# Altium PCB bh_netlan_0_alph.PcbDoc (part 2 of 2)
Units mm, origin at the board's own origin, x right, y up, seen from the top; angles counter-clockwise.
Board outline 39.5 x 59.44 mm, 2 copper layers (Top Layer, Bottom Layer); 62 components, 42 nets, 232 pads, 67 vias.
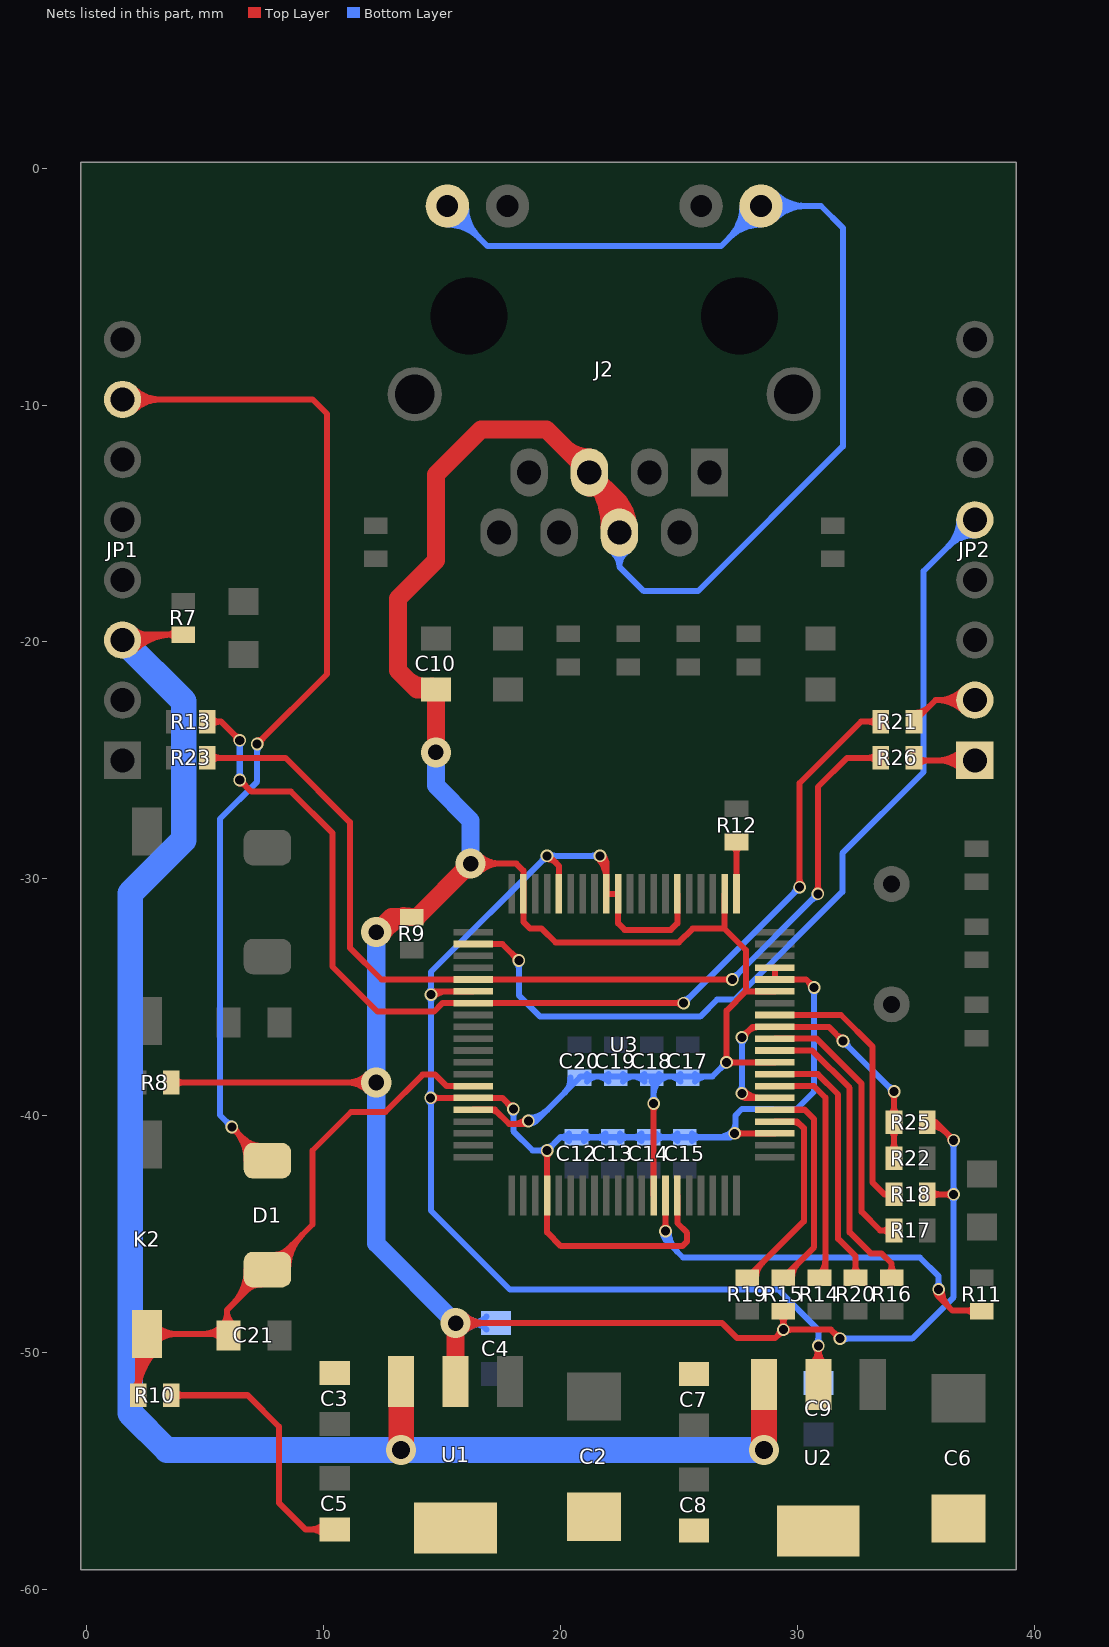
[diagram p2: the nets of this part, all layers, seen from the top]

## Via types
v1: diameter 0.533, hole 0.381, Top Layer to Bottom Layer, tented both sides, 53 vias
v2: diameter 1.27, hole 0.66, Top Layer to Bottom Layer, tented both sides, 8 vias
v3: diameter 0.533, hole 0.381, Top Layer to Bottom Layer, 4 vias
v4: diameter 1.27, hole 0.762, Top Layer to Bottom Layer, tented both sides, 2 vias

## Nets (pads, with @x,y where several pads share a name; then routed paths per layer and width w, separated by ;. In a path a pad name is that pad's centre, name@x,y a point inside that pad or via, vN(x,y) a via of type N, cw(c..) or ccw(c..) an arc to the next point about the centre after c; other vN are vias at no path point) (continued)
NetR11_1: R11.1 U3.14 | length 23.3
  Top Layer w0.254: v1@24.333,-44.783 ccw(c24.095,-44.545) 24.432,-44.545 ccw(c24.769,-44.545) v1@24.531,-44.783 ; v1(24.432,-44.882) U3.14@24.432,-43.378 ; v1@35.852,-47.343 ccw(c36.291,-47.354) 35.98,-47.664 ; v1(35.966,-47.346) 35.966,-47.65 ; v1@36.106,-47.349 ccw(c37.104,-47.376) 36.398,-48.082 ; 37.042,-48.235 cw(c37.042,-48.86) R11.1@37.484,-48.418 ; 37.165,-48.235 ccw(c37.165,-47.783) R11.1@37.484,-48.102 ; R11.1@37.592,-48.235 36.551,-48.235 35.966,-47.65 ; 35.966,-47.65 ccw(c35.704,-47.65) 35.875,-47.451 cw(c35.704,-47.65) 35.966,-47.65 ; 35.966,-47.65 cw(c36.229,-47.65) 36.058,-47.451 ccw(c36.229,-47.65) 35.966,-47.65
  Bottom Layer w0.254: v1@24.318,-44.882 ccw(c24.955,-44.882) 24.505,-45.333 ; v1(24.432,-44.882) 24.432,-45.26 25.171,-45.999 35.179,-45.999 35.966,-46.787 v1(35.966,-47.346) ; v1@24.572,-44.882 ccw(c25.823,-44.882) 24.938,-45.766 ; v1@35.868,-47.247 ccw(c35.629,-47.008) 35.966,-47.008 ccw(c36.304,-47.008) v1@36.065,-47.247 ; 24.432,-45.219 ccw(c24.095,-45.219) 24.333,-44.981 cw(c24.095,-45.219) 24.432,-45.219 ; 24.432,-45.219 cw(c24.769,-45.219) 24.531,-44.981 ccw(c24.769,-45.219) 24.432,-45.219
NetR12_1: R12.1 U3.41 | length 3
  Top Layer w0.254: R12.1@27.274,-28.606 cw(c26.894,-28.986) 27.432,-28.986 cw(c27.97,-28.986) R12.1@27.59,-28.606 ; U3.41@27.432,-30.638 R12.1@27.432,-28.448
NetR14_2: R14.2 U3.27 | length 10.8
  Top Layer w0.254: U3.27@29.052,-38.758 30.706,-38.758 31.191,-39.243 31.191,-46.606 R14.2@30.937,-46.86 ; R14.2@30.93,-46.702 ccw(c30.298,-46.071) 31.191,-46.071
NetR15_2: R15.2 U3.25 | length 9.8
  Top Layer w0.254: U3.25@29.052,-39.758 30.309,-39.758 30.709,-40.157 30.709,-45.565 R15.2@29.413,-46.86 ; R15.2@29.786,-46.86 cw(c30.687,-46.86) 30.05,-46.223
NetR16_2: R16.2 U3.30 | length 13.7
  Top Layer w0.254: U3.30@29.052,-37.258 30.628,-37.258 32.207,-38.837 32.207,-44.933 33.096,-45.822 33.553,-45.822 33.985,-46.253 R16.2@33.985,-46.86 ; R16.2@33.828,-46.702 ccw(c33.447,-46.322) 33.985,-46.322 ccw(c34.524,-46.322) R16.2@34.143,-46.702
NetR17_2: R17.2 U3.31 | length 12.4
  Top Layer w0.254: U3.31@29.052,-36.758 30.814,-36.758 32.715,-38.659 32.715,-44.069 33.503,-44.856 R17.2@34.084,-44.856 ; R17.2@33.926,-45.014 ccw(c33.545,-45.395) 33.545,-44.856 ccw(c33.545,-44.318) R17.2@33.926,-44.699
NetR18_2: R18.2 U3.33 | length 12
  Top Layer w0.254: U3.33@29.052,-35.758 31.846,-35.758 33.172,-37.084 33.172,-42.824 33.68,-43.332 ; R18.2@33.895,-43.451 ccw(c33.68,-43.586) 33.68,-43.332 ; R18.2@33.895,-43.214 cw(c33.68,-43.079) 33.68,-43.332 ; R18.2@34.084,-43.332 33.68,-43.332
NetR19_2: R19.2 U3.24 | length 10.2
  Top Layer w0.254: R19.2@27.889,-46.86 30.277,-44.472 30.277,-40.538 29.996,-40.258 U3.24@29.052,-40.258 ; R19.2@28.262,-46.86 cw(c29.163,-46.86) 28.526,-46.223 ; U3.24@29.751,-40.271 cw(c29.751,-40.894) 30.191,-40.453 ; U3.24@29.753,-40.27 cw(c29.833,-40.666) 30.119,-40.381
NetR20_2: R20.2 U3.28 | length 11.9
  Top Layer w0.254: U3.28@29.052,-38.258 30.866,-38.258 31.725,-39.116 31.725,-45.212 32.461,-45.949 R20.2@32.461,-46.86 ; R20.2@32.304,-46.702 ccw(c31.923,-46.322) 32.461,-46.322 ccw(c33,-46.322) R20.2@32.619,-46.702
NetR22_1: R22.1 R25.2 U3.26 U3.32 | length 22.6
  Top Layer w0.254: v1@27.58,-39.146 ccw(c27.85,-38.876) 27.85,-39.258 ; v1(27.661,-39.065) 27.853,-39.258 U3.26@29.052,-39.258 ; v1(27.661,-36.703) 28.106,-36.258 U3.32@29.052,-36.258 31.33,-36.258 v1(31.928,-36.855) ; v1@27.661,-36.563 ccw(c27.661,-36.226) 27.899,-36.465 ccw(c28.138,-36.703) v1@27.8,-36.703 ; v1@27.759,-38.966 ccw(c28.463,-38.263) U3.26@28.463,-39.258 ; 27.909,-36.455 cw(c28.354,-36.9) U3.32@28.354,-36.27 ; 27.982,-36.382 cw(c28.27,-36.67) U3.32@28.351,-36.27 ; v1@31.788,-36.855 ccw(c31.451,-36.855) 31.689,-36.617 ccw(c31.928,-36.378) v1@31.928,-36.716 ; R22.1@33.926,-41.501 ccw(c33.545,-41.12) 34.084,-41.12 ccw(c34.622,-41.12) R22.1@34.241,-41.501 ; R25.2@33.926,-40.592 cw(c33.545,-40.973) 34.084,-40.973 cw(c34.622,-40.973) R25.2@34.241,-40.592 ; R25.2@33.926,-39.977 ccw(c33.545,-39.596) 34.084,-39.596 ccw(c34.622,-39.596) R25.2@34.241,-39.977 ; v1@33.988,-39.088 cw(c33.757,-39.319) 34.084,-39.319 ; R22.1@34.084,-41.808 R25.2@34.084,-40.284 v1@34.084,-38.992 ; 34.084,-39.334 cw(c34.431,-39.334) v1@34.186,-39.088
  Bottom Layer w0.254: v1@27.562,-38.966 ccw(c27.323,-38.728) 27.661,-38.728 ccw(c27.998,-38.728) v1@27.759,-38.966 ; v1@27.562,-36.802 cw(c27.323,-37.04) 27.661,-37.04 cw(c27.998,-37.04) v1@27.759,-36.802 ; v1(27.661,-39.065) v1(27.661,-36.703) ; v1@31.928,-36.995 cw(c31.928,-37.332) 32.166,-37.094 cw(c32.405,-36.855) v1@32.067,-36.855 ; v1(31.928,-36.855) v1@34.087,-39.014 ; 33.805,-38.733 ccw(c34.087,-38.451) v1@34.087,-38.849 ; 33.866,-38.794 cw(c33.671,-38.989) v1@33.947,-38.989
  other v1: 34.087,-38.989
NNRST: D1.2 JP1.7 | length 52.7
  Top Layer w0.254: JP1.7@1.5,-9.76 9.531,-9.76 10.135,-10.363 10.135,-21.361 v1(7.188,-24.308) ; JP1.7@1.787,-10.047 cw(c2.481,-10.741) 2.481,-9.76 cw(c2.481,-8.779) JP1.7@1.787,-9.473 ; JP1.7@1.967,-10.227 cw(c3.094,-11.354) 3.094,-9.76 cw(c3.094,-8.166) JP1.7@1.967,-9.293 ; v1@6.121,-40.627 cw(c6.121,-40.965) 6.36,-40.726 cw(c6.598,-40.488) v1@6.261,-40.488 ; v1(6.121,-40.488) D1.2@7.544,-41.91 ; v1@6.183,-40.55 cw(c4.823,-41.91) D1.2@6.747,-41.91 ; 6.603,-40.97 ccw(c7.37,-40.203) D1.2@7.37,-41.287 ; 6.617,-40.983 cw(c5.69,-41.91) D1.2@7.001,-41.91 ; v1@7.188,-24.168 ccw(c7.188,-23.831) 7.427,-24.069 ccw(c7.665,-24.308) v1@7.328,-24.308
  Bottom Layer w0.254: v1@5.982,-40.488 ccw(c5.644,-40.488) 5.883,-40.249 ccw(c6.121,-40.011) v1@6.121,-40.348 ; v1(6.121,-40.488) 5.613,-39.98 5.613,-27.478 7.188,-25.903 v1(7.188,-24.308) ; v1@7.089,-24.407 cw(c6.851,-24.645) 7.188,-24.645 cw(c7.525,-24.645) v1@7.287,-24.407
NRST: C21.2 D1.1 K2.2 R10.2 U3.74 | length 40.8
  Top Layer w0.254: R10.2@1.998,-51.508 ccw(c1.618,-51.128) 2.156,-51.128 ccw(c2.694,-51.128) R10.2@2.314,-51.508 ; R10.2@2.156,-51.816 2.156,-49.61 K2.2@2.54,-49.226 5.905,-49.226 5.905,-48.225 ; R10.2@2.156,-51.761 cw(c4.693,-51.761) K2.2@2.899,-49.966 ; 2.156,-51.147 cw(c4.08,-51.147) K2.2@2.72,-49.787 ; 2.156,-50.534 cw(c3.467,-50.534) K2.2@2.54,-49.607 ; K2.2@2.899,-49.585 cw(c3.766,-50.453) 3.766,-49.226 cw(c3.766,-48) K2.2@2.899,-48.867 ; 4.897,-49.226 ccw(c4.897,-48.091) 5.7,-48.894 ccw(c5.204,-48.398) 5.905,-48.398 ; 5.201,-49.226 cw(c5.201,-49.931) C21.2@5.7,-49.433 ; 6.13,-48 ccw(c4.639,-46.51) D1.1@6.747,-46.51 ; C21.2@6.21,-48.868 cw(c6.735,-48.225) 5.905,-48.225 ; 6.563,-47.567 ccw(c5.507,-46.51) D1.1@7.001,-46.51 ; 6.733,-47.397 cw(c7.37,-48.034) D1.1@7.37,-47.133 ; D1.1@7.87,-45.887 ccw(c7.87,-44.987) 8.507,-45.623 ; D1.1@8.239,-46.51 cw(c9.733,-46.51) 8.677,-45.453 ; D1.1@8.493,-46.51 cw(c10.601,-46.51) 9.11,-45.02 ; U3.74@16.312,-38.758 15.187,-38.758 14.707,-38.278 14.173,-38.278 12.598,-39.853 11.151,-39.853 9.525,-41.478 9.525,-44.605 D1.1@7.62,-46.51 5.905,-48.225
RTS: JP2.5 U3.62 | length 43
  Top Layer w0.254: U3.62@16.312,-32.758 17.543,-32.758 v1(18.237,-33.452) ; v1@18.098,-33.452 ccw(c17.76,-33.452) 17.999,-33.213 ccw(c18.237,-32.975) v1@18.237,-33.312
  Bottom Layer w0.254: v1@18.138,-33.551 cw(c17.9,-33.789) 18.237,-33.789 cw(c18.574,-33.789) v1@18.336,-33.551 ; v1(18.237,-33.452) 18.237,-34.925 19.139,-35.827 25.895,-35.827 26.619,-35.103 27.356,-35.103 31.902,-30.556 31.902,-28.931 35.331,-25.502 35.331,-17.009 JP2.5@37.5,-14.84 ; JP2.5@36.84,-14.84 cw(c35.245,-14.84) 36.373,-15.967 cw(c37.5,-17.095) JP2.5@37.5,-15.5 ; JP2.5@37.094,-14.84 cw(c36.112,-14.84) 36.806,-15.534 cw(c37.5,-16.228) JP2.5@37.5,-15.246
RXD00: JP2.2 R21.2 | length 7.7
  Top Layer w0.254: R21.2@34.928,-23.368 35.836,-22.46 JP2.2@37.5,-22.46 ; R21.2@34.928,-22.995 ccw(c34.928,-22.095) 35.565,-22.731 ; JP2.2@37.033,-22.927 ccw(c35.906,-24.054) 35.906,-22.46 ccw(c35.906,-20.866) JP2.2@37.033,-21.993 ; JP2.2@37.213,-22.747 ccw(c36.519,-23.441) 36.519,-22.46 ccw(c36.519,-21.479) JP2.2@37.213,-22.173
RXD0: R23.1 R26.1 U3.65 | length 45.8
  Top Layer w0.254: R23.1@5.08,-24.892 8.382,-24.892 11.1,-27.61 11.1,-32.918 12.439,-34.258 U3.65@16.312,-34.258 v1(27.254,-34.258) ; R23.1@5.238,-25.05 cw(c5.618,-25.43) 5.618,-24.892 cw(c5.618,-24.354) R23.1@5.238,-24.734 ; v1@27.155,-34.357 ccw(c26.917,-34.595) 26.917,-34.258 ccw(c26.917,-33.921) v1@27.155,-34.159 ; v1@30.772,-30.543 ccw(c30.533,-30.304) 30.87,-30.304 ccw(c31.208,-30.304) v1@30.969,-30.543 ; v1(30.87,-30.642) 30.87,-26.127 32.106,-24.892 R26.1@33.528,-24.892 ; R26.1@33.37,-25.05 ccw(c32.99,-25.43) 32.99,-24.892 ccw(c32.99,-24.354) R26.1@33.37,-24.734
  Bottom Layer w0.254: v1(27.254,-34.258) v1(30.87,-30.642) ; v1@27.254,-34.118 ccw(c27.254,-33.781) 27.493,-34.019 ccw(c27.731,-34.258) v1@27.394,-34.258 ; v1@30.731,-30.642 cw(c30.393,-30.642) 30.632,-30.88 cw(c30.87,-31.119) v1@30.87,-30.781
TXD00: JP2.1 R26.2 | length 7.5
  Top Layer w0.254: R26.2@34.928,-24.892 35.036,-25 JP2.1@37.5,-25 ; R26.2@35.086,-25.2 cw(c35.568,-25.682) 35.568,-25 ; R26.2@35.086,-24.884 ccw(c35.365,-24.605) 35.365,-25 ; JP2.1@37.033,-25.467 ccw(c35.906,-26.594) 35.906,-25 ccw(c35.906,-23.406) JP2.1@37.033,-24.533 ; JP2.1@37.213,-25.287 ccw(c36.519,-25.981) 36.519,-25 ccw(c36.519,-24.019) JP2.1@37.213,-24.713
TXD0: R13.1 R21.1 U3.67 | length 51.4
  Top Layer w0.254: R13.1@5.08,-23.368 5.664,-23.368 v1(6.452,-24.155) ; R13.1@5.238,-23.526 cw(c5.618,-23.906) 5.618,-23.368 cw(c5.618,-22.83) R13.1@5.238,-23.21 ; v1@6.312,-24.155 ccw(c5.975,-24.155) 6.213,-23.917 ccw(c6.452,-23.678) v1@6.452,-24.016 ; v1@6.452,-25.971 cw(c6.452,-26.309) 6.69,-26.07 cw(c6.929,-25.832) v1@6.591,-25.832 ; v1(6.452,-25.832) 6.939,-26.319 8.616,-26.319 10.363,-28.067 10.363,-33.706 12.268,-35.611 14.656,-35.611 15.009,-35.258 U3.67@16.312,-35.258 v1(25.197,-35.255) ; v1@25.098,-35.354 ccw(c24.86,-35.593) 24.86,-35.255 ccw(c24.859,-34.918) v1@25.098,-35.156 ; v1@30,-30.254 ccw(c29.762,-30.016) 30.099,-30.016 ccw(c30.436,-30.016) v1@30.198,-30.254 ; v1(30.099,-30.353) 30.099,-25.959 32.69,-23.368 R21.1@33.528,-23.368 ; R21.1@33.37,-23.526 ccw(c32.99,-23.906) 32.99,-23.368 ccw(c32.99,-22.83) R21.1@33.37,-23.21
  Bottom Layer w0.254: v1@6.353,-25.733 ccw(c6.114,-25.495) 6.452,-25.495 ccw(c6.789,-25.495) v1@6.55,-25.733 ; v1@6.353,-24.254 cw(c6.114,-24.493) 6.452,-24.493 cw(c6.789,-24.493) v1@6.55,-24.254 ; v1(6.452,-25.832) v1(6.452,-24.155) ; v1(25.197,-35.255) v1(30.099,-30.353) ; v1@25.197,-35.115 ccw(c25.197,-34.778) 25.435,-35.017 ccw(c25.674,-35.255) v1@25.336,-35.255 ; v1@29.959,-30.353 cw(c29.622,-30.353) 29.861,-30.591 cw(c30.099,-30.83) v1@30.099,-30.493
VCC5V: C3.1 C7.1 JP1.3 R7.2 U1.3 U2.3 | length 75.9
  Top Layer w0.254: JP1.3@1.608,-20.028 cw(c2.428,-20.848) 2.428,-19.688 ; JP1.3@1.732,-19.688 R7.2@4.064,-19.688 ; JP1.3@1.787,-20.207 cw(c3.041,-21.461) 3.041,-19.688 ; JP1.3@1.967,-20.387 cw(c3.654,-22.074) R7.2@3.654,-19.688 ; JP1.3@1.967,-19.453 ccw(c2.534,-18.886) 2.534,-19.688 ; R7.2@3.756,-19.846 ccw(c3.376,-20.226) 3.376,-19.688 ccw(c3.376,-19.15) R7.2@3.756,-19.53
  Top Layer w1.092: v4(13.27,-54.127) U1.3@13.27,-51.231 ; v4(28.586,-54.127) U2.3@28.586,-51.358
  Bottom Layer w0.254: v4@13.118,-54.28 v4(13.27,-54.127)
  Bottom Layer w1.092: JP1.3@1.5,-19.92 4.089,-22.509 4.089,-28.362 1.829,-30.623 1.829,-52.578 3.378,-54.127 v4(13.27,-54.127) v4(28.586,-54.127)
VCC18: C6.1 C8.1 C9.1 C12.1 C13.1 C14.1 C15.1 U2.2 U2.4 U3.4 U3.15 U3.23 U3.36 U3.37 U3.46 U3.51 U3.52 U3.56 U3.66 U3.75 | length 115.5
  Top Layer w0.254: v1(14.514,-39.258) U3.75@16.312,-39.258 17.541,-39.258 v1(18.009,-39.726) ; v1(14.529,-34.9) 14.671,-34.758 U3.66@16.312,-34.758 ; v1@14.613,-39.357 cw(c14.851,-39.595) 14.851,-39.258 cw(c14.851,-38.921) v1@14.613,-39.159 ; v1@14.628,-34.998 cw(c15.208,-35.579) 15.208,-34.758 ; v1@17.869,-39.726 ccw(c17.532,-39.726) 17.77,-39.487 ccw(c18.009,-39.249) v1@18.009,-39.586 ; v1@19.333,-41.576 cw(c19.095,-41.814) 19.432,-41.814 cw(c19.769,-41.814) v1@19.531,-41.576 ; v1@19.431,-29.172 cw(c19.431,-29.693) 19.8,-29.325 ; v1(19.432,-41.477) U3.4@19.432,-43.378 19.432,-44.934 20.015,-45.517 25.146,-45.517 25.349,-45.314 25.349,-44.959 24.932,-44.542 U3.15@24.932,-43.378 ; v1@19.571,-29.096 19.932,-29.457 U3.56@19.932,-30.638 ; v1@21.567,-29.131 cw(c20.687,-30.012) U3.52@21.932,-30.012 ; v1(21.666,-29.032) 21.932,-29.298 U3.52@21.932,-30.638 U3.51@22.432,-30.638 22.432,-31.881 22.708,-32.156 24.663,-32.156 24.932,-31.888 U3.46@24.932,-30.638 ; v1@21.747,-28.951 cw(c21.3,-29.398) 21.932,-29.398 ; v1(27.356,-40.758) U3.23@29.052,-40.758 ; v1@27.455,-40.857 cw(c27.693,-41.095) 27.693,-40.758 cw(c27.693,-40.421) v1@27.455,-40.659 ; U3.37@29.052,-33.758 U3.36@29.052,-34.258 30.372,-34.258 v1(30.709,-34.595) ; v1@30.569,-34.595 ccw(c30.232,-34.595) 30.47,-34.356 ccw(c30.709,-34.118) v1@30.709,-34.455 ; U2.2@30.587,-50.533 ccw(c29.865,-49.811) 30.886,-49.811 ccw(c31.908,-49.811) U2.2@31.186,-50.533 ; v1@30.788,-49.832 cw(c30.549,-50.07) 30.886,-50.07 cw(c31.224,-50.07) v1@30.985,-49.832 ; U2.2@30.886,-51.358 v1(30.886,-49.733)
  Bottom Layer w0.254: v1@14.415,-39.357 cw(c14.141,-39.631) 14.529,-39.631 ; v1@14.415,-39.159 ccw(c14.141,-38.885) 14.529,-38.885 ; v1@14.43,-34.998 cw(c14.192,-35.237) 14.529,-35.237 cw(c14.866,-35.237) v1@14.628,-34.998 ; v1@14.43,-34.801 ccw(c14.192,-34.562) 14.529,-34.562 ccw(c14.866,-34.562) v1@14.628,-34.801 ; 14.529,-39.559 cw(c14.816,-39.559) v1@14.613,-39.357 ; 14.529,-38.956 ccw(c14.816,-38.956) v1@14.613,-39.159 ; v1@17.91,-39.824 cw(c17.671,-40.063) 18.009,-40.063 cw(c18.346,-40.063) v1@18.107,-39.824 ; v1(18.009,-39.726) 18.009,-40.665 18.82,-41.477 v1(19.432,-41.477) 19.99,-40.919 ; v1@19.291,-29.032 cw(c18.954,-29.032) 19.193,-29.271 cw(c19.431,-29.509) v1@19.431,-29.172 ; v1@19.333,-41.576 ccw(c19.095,-41.814) 19.095,-41.477 ccw(c19.095,-41.14) v1@19.333,-41.378 ; v1@19.432,-41.337 ccw(c19.432,-41) 19.671,-41.239 ccw(c19.909,-41.477) v1@19.572,-41.477 ; v1@19.53,-29.131 cw(c19.768,-29.369) 19.768,-29.032 cw(c19.768,-28.695) v1@19.53,-28.933 ; C12.1@20.367,-41.077 ccw(c19.99,-41.452) 19.99,-40.919 ; C12.1@20.367,-40.762 cw(c19.99,-40.387) 19.99,-40.919 ; C12.1@20.983,-41.077 cw(c21.364,-41.458) 21.364,-40.919 cw(c21.364,-40.381) C12.1@20.983,-40.762 ; v1@21.567,-29.131 ccw(c21.329,-29.369) 21.329,-29.032 ccw(c21.329,-28.695) v1@21.567,-28.933 ; v1(21.666,-29.032) v1(19.431,-29.032) 14.529,-33.934 v1(14.529,-34.9) 14.529,-44.018 17.862,-47.351 29.19,-47.351 30.886,-49.047 v1(30.886,-49.733) C9.1@30.886,-51.294 ; C13.1@21.892,-41.077 ccw(c21.511,-41.458) 21.511,-40.919 ccw(c21.511,-40.381) C13.1@21.892,-40.762 ; C13.1@22.507,-41.077 cw(c22.888,-41.458) 22.888,-40.919 cw(c22.888,-40.381) C13.1@22.507,-40.762 ; C14.1@23.416,-41.077 ccw(c23.035,-41.458) 23.035,-40.919 ccw(c23.035,-40.381) C14.1@23.416,-40.762 ; C14.1@24.031,-41.077 cw(c24.412,-41.458) 24.412,-40.919 cw(c24.412,-40.381) C14.1@24.031,-40.762 ; C15.1@24.94,-41.077 ccw(c24.559,-41.458) 24.559,-40.919 ccw(c24.559,-40.381) C15.1@24.94,-40.762 ; C15.1@25.555,-41.077 cw(c25.936,-41.458) 25.936,-40.919 cw(c25.936,-40.381) C15.1@25.555,-40.762 ; 26.628,-40.919 ccw(c26.628,-40.03) 27.257,-40.659 ccw(c26.957,-40.359) 27.381,-40.359 ; 27.381,-40.482 ccw(c27.632,-40.482) v1@27.455,-40.659 ; v1@30.61,-34.694 cw(c30.371,-34.932) 30.709,-34.932 cw(c31.046,-34.932) v1@30.807,-34.694 ; C9.1@30.631,-51.039 ccw(c30.013,-50.421) 30.886,-50.421 ; v1(30.709,-34.595) 30.709,-38.989 29.972,-39.726 27.661,-39.726 27.381,-40.005 27.381,-40.716 27.178,-40.919 C15.1@25.248,-40.919 C14.1@23.724,-40.919 C13.1@22.2,-40.919 C12.1@20.676,-40.919 19.99,-40.919 ; v1@30.788,-49.832 cw(c30.549,-50.07) 30.886,-50.07 cw(c31.224,-50.07) v1@30.985,-49.832 ; v1@30.788,-49.634 ccw(c30.549,-49.396) 30.886,-49.396 ccw(c31.224,-49.396) v1@30.985,-49.634 ; 30.886,-50.355 ccw(c31.853,-50.355) C9.1@31.169,-51.039
VCC33: C2.1 C4.1 C5.1 C10.2 C17.1 C18.1 C19.1 C20.1 J2.4 J2.5 J2.9 J2.12 R8.1 R9.2 R10.1 R15.1 R18.1 R25.1 U1.2 U1.4 U3.13 U3.29 U3.35 U3.42 U3.59 U3.76 | length 256.8
  Top Layer w0.254: R10.1@3.556,-51.816 6.782,-51.816 8.103,-53.137 8.103,-56.363 9.22,-57.48 C5.1@10.465,-57.48 ; R8.1@3.556,-38.608 v2(12.217,-38.608) ; R10.1@3.714,-51.974 cw(c4.094,-52.354) 4.094,-51.816 cw(c4.094,-51.278) R10.1@3.714,-51.658 ; R8.1@3.714,-38.766 cw(c4.094,-39.146) 4.094,-38.608 cw(c4.094,-38.07) R8.1@3.714,-38.45 ; C5.1@10.068,-57.75 ccw(c9.418,-58.4) 9.418,-57.48 ccw(c9.418,-56.56) C5.1@10.068,-57.211 ; v2@11.858,-38.967 ccw(c10.991,-39.834) 10.991,-38.608 ccw(c10.991,-37.382) v2@11.858,-38.249 ; v2@15.85,-49.047 v2(15.57,-48.768) 26.822,-48.768 27.457,-49.403 29.058,-49.403 v1(29.413,-49.047) ; v2@15.929,-49.127 cw(c16.797,-49.994) 16.797,-48.768 cw(c16.797,-47.542) v2@15.929,-48.409 ; v2(16.205,-29.362) 18.136,-29.362 18.432,-29.659 U3.59@18.432,-30.638 18.432,-31.818 18.72,-32.106 19.202,-32.106 19.787,-32.69 24.994,-32.69 25.578,-32.106 26.924,-32.106 27.828,-33.009 27.828,-34.758 ; U3.76@16.312,-39.758 17.228,-39.758 17.831,-40.361 v1@18.517,-40.361 ; v2@16.564,-29.722 cw(c17.432,-30.589) 17.432,-29.362 cw(c17.432,-28.136) v2@16.564,-29.003 ; U3.76@17.011,-39.77 cw(c17.011,-40.326) 17.403,-39.933 ; U3.76@17.013,-39.77 cw(c17.086,-40.117) 17.337,-39.866 ; 18,-40.361 ccw(c18,-39.59) v1@18.545,-40.135 ; v1@23.833,-39.59 cw(c23.595,-39.829) 23.932,-39.829 cw(c24.269,-39.829) v1@24.031,-39.59 ; U3.13@23.932,-43.378 v1(23.932,-39.492) ; v1@26.913,-37.659 ccw(c26.675,-37.421) 27.012,-37.421 ccw(c27.349,-37.421) 27.111,-37.659 ccw(c27.349,-37.421) 27.349,-37.758 ccw(c27.349,-38.095) v1@27.111,-37.857 ; 26.932,-32.106 U3.42@26.932,-30.638 ; U3.29@29.052,-37.758 v1(27.012,-37.758) 27.012,-35.573 27.828,-34.758 ; U3.35@29.052,-34.758 27.828,-34.758 ; R15.1@29.256,-48.418 cw(c28.875,-48.798) 29.413,-48.798 cw(c29.952,-48.798) R15.1@29.571,-48.418 ; v1@29.273,-49.047 cw(c28.936,-49.047) 29.175,-49.286 cw(c29.413,-49.524) v1@29.413,-49.187 ; v1@29.314,-48.949 ccw(c29.076,-48.71) 29.413,-48.71 ccw(c29.75,-48.71) 29.512,-48.949 ccw(c29.75,-48.71) 29.75,-49.047 ccw(c29.75,-49.385) v1@29.512,-49.146 ; R15.1@29.413,-48.26 v1(29.413,-49.047) ; v1@31.661,-49.428 ccw(c31.324,-49.428) 31.562,-49.19 ccw(c31.801,-48.951) v1@31.801,-49.289 ; v1(31.801,-49.428) 31.42,-49.047 v1(29.413,-49.047) ; R18.1@35.484,-43.332 v1(36.601,-43.332) ; R25.1@35.484,-40.403 cw(c35.484,-41.549) 36.294,-40.739 ; R25.1@35.484,-40.284 35.839,-40.284 ; R25.1@35.484,-40.149 cw(c35.484,-40.682) 35.86,-40.305 ; R18.1@35.641,-43.49 cw(c36.022,-43.871) 36.022,-43.332 cw(c36.022,-42.794) R18.1@35.641,-43.175 ; R25.1@35.685,-40.382 cw(c35.839,-40.456) 35.839,-40.284 ; R25.1@35.685,-40.187 ccw(c35.839,-40.112) 35.839,-40.284 ; v1@36.462,-41.046 ccw(c36.124,-41.046) 36.363,-40.808 ccw(c36.601,-40.569) v1@36.601,-40.907 ; v1@36.503,-43.431 ccw(c36.264,-43.67) 36.264,-43.332 ccw(c36.264,-42.995) v1@36.503,-43.234 ; v1(36.601,-41.046) 35.839,-40.284
  Top Layer w0.762: v2(12.217,-32.258) 12.855,-31.62 R9.2@13.716,-31.62 ; v2@12.406,-32.07 cw(c13.566,-33.23) R9.2@13.566,-31.589 ; v2@12.441,-32.379 cw(c13.716,-33.071) R9.2@13.716,-31.62 ; v2@12.5,-31.975 cw(c13.446,-32.921) R9.2@13.569,-31.589 ; 13.469,-21.546 ccw(c14.34,-20.675) C10.2@14.58,-21.883 ; v2(14.732,-24.663) C10.2@14.732,-22.008 13.931,-22.008 13.132,-21.209 13.132,-18.161 14.732,-16.561 14.732,-12.929 16.637,-11.024 19.399,-11.024 J2.5@21.214,-12.839 22.484,-14.109 J2.4@22.484,-15.379 ; U1.2@15.57,-51.231 v2(15.57,-48.768) ; v2(16.205,-29.362) 13.948,-31.62 R9.2@13.716,-31.62 ; 20.13,-11.755 ccw(c21.214,-10.671) J2.5@21.214,-12.204 ; J2.5@21.054,-12.678 cw(c18.582,-15.15) J2.4@22.078,-15.15 ; J2.5@21.214,-13.474 cw(c21.214,-15.007) 22.298,-13.923 ; J2.4@22.197,-14.863 ccw(c21.503,-14.169) 22.484,-14.169 ccw(c23.465,-14.169) J2.4@22.771,-14.863 ; 22.355,-13.979 cw(c21.184,-15.15) J2.4@22.84,-15.15
  Bottom Layer w0.254: J2.12@15.22,-2.376 cw(c15.22,-4.277) 16.564,-2.933 cw(c17.908,-1.589) J2.12@16.007,-1.589 ; J2.12@15.22,-2.122 cw(c15.22,-3.41) 16.13,-2.499 cw(c17.041,-1.589) J2.12@15.753,-1.589 ; J2.12@15.22,-1.589 16.908,-3.277 26.781,-3.277 J2.9@28.469,-1.589 31.002,-1.589 31.928,-2.515 31.928,-11.735 25.806,-17.856 23.52,-17.856 22.484,-16.82 ; v2(15.57,-48.768) C4.1@17.272,-48.768 ; v2@15.929,-49.127 cw(c16.797,-49.994) 16.797,-48.768 cw(c16.797,-47.542) v2@15.929,-48.409 ; C4.1@16.876,-49.037 ccw(c16.225,-49.688) 16.225,-48.768 ccw(c16.225,-47.848) C4.1@16.876,-48.499 ; v1@18.644,-40.348 ccw(c18.644,-39.827) 19.012,-40.195 ; v1(18.644,-40.234) 18.974,-40.234 ; v1@18.644,-40.094 ccw(c18.644,-38.959) 19.446,-39.762 ; v1@18.744,-40.331 cw(c18.974,-40.554) 18.974,-40.234 ; v1@18.744,-40.136 ccw(c18.974,-39.913) 18.974,-40.234 ; 20.166,-39.042 ccw(c19.529,-38.405) C20.1@20.43,-38.405 ; C20.1@21.11,-38.562 cw(c21.614,-39.066) 21.614,-38.354 ; C20.1@21.11,-38.247 ccw(c21.368,-37.989) 21.368,-38.354 ; 21.516,-38.354 cw(c21.516,-39.066) C19.1@22.019,-38.562 ; 21.761,-38.354 ccw(c21.761,-37.989) C19.1@22.019,-38.247 ; J2.4@22.126,-16.162 cw(c21.701,-16.82) 22.484,-16.82 ; J2.4@22.484,-15.379 22.484,-16.82 ; C19.1@22.634,-38.562 cw(c23.138,-39.066) 23.138,-38.354 ; C19.1@22.634,-38.247 ccw(c22.892,-37.989) 22.892,-38.354 ; J2.4@22.842,-16.162 ccw(c23.267,-16.82) 22.484,-16.82 ; 23.04,-38.354 cw(c23.04,-39.066) C18.1@23.543,-38.562 ; 23.285,-38.354 ccw(c23.285,-37.989) C18.1@23.543,-38.247 ; v1@23.833,-39.393 ccw(c23.595,-39.154) 23.932,-39.154 ccw(c24.269,-39.154) v1@24.031,-39.393 ; C18.1@23.843,-38.562 cw(c23.627,-38.778) 23.932,-38.778 ; v1(23.932,-39.492) C18.1@23.932,-38.486 ; 23.932,-39.108 cw(c24.704,-39.108) 24.158,-38.562 cw(c24.662,-39.066) 24.662,-38.354 ; C18.1@24.158,-38.247 ccw(c24.416,-37.989) 24.416,-38.354 ; 24.564,-38.354 cw(c24.564,-39.066) C17.1@25.067,-38.562 ; 24.809,-38.354 ccw(c24.809,-37.989) C17.1@25.067,-38.247 ; C17.1@25.682,-38.562 cw(c26.186,-39.066) 26.186,-38.354 ; C17.1@25.682,-38.247 ccw(c25.94,-37.989) 25.94,-38.354 ; v1@26.872,-37.758 cw(c26.535,-37.758) 26.774,-37.996 cw(c27.012,-38.235) v1@27.012,-37.898 ; v1(27.012,-37.758) 26.416,-38.354 20.853,-38.354 C20.1@20.803,-38.405 18.974,-40.234 ; J2.9@27.682,-1.589 cw(c25.781,-1.589) 27.125,-2.933 cw(c28.469,-4.277) J2.9@28.469,-2.376 ; J2.9@27.936,-1.589 cw(c26.648,-1.589) 27.558,-2.499 cw(c28.469,-3.41) J2.9@28.469,-2.122 ; J2.9@28.846,-1.966 cw(c29.757,-2.876) 29.757,-1.589 cw(c29.757,-0.301) J2.9@28.846,-1.211 ; J2.9@29.026,-2.145 cw(c30.37,-3.49) 30.37,-1.589 cw(c30.37,0.312) J2.9@29.026,-1.032 ; v1(31.801,-49.428) 34.849,-49.428 36.601,-47.676 v1(36.601,-43.332) v1(36.601,-41.046) ; v1@31.9,-49.527 cw(c32.138,-49.766) 32.138,-49.428 cw(c32.138,-49.091) v1@31.9,-49.33 ; v1@36.503,-43.431 cw(c36.264,-43.67) 36.601,-43.67 cw(c36.939,-43.67) v1@36.7,-43.431 ; v1@36.503,-43.234 ccw(c36.264,-42.995) 36.601,-42.995 ccw(c36.939,-42.995) v1@36.7,-43.234 ; v1@36.503,-41.145 cw(c36.264,-41.384) 36.601,-41.384 cw(c36.939,-41.384) v1@36.7,-41.145
  Bottom Layer w0.762: v2(12.217,-32.258) v2(12.217,-38.608) 12.217,-45.415 v2(15.57,-48.768) ; v2(14.732,-24.663) 14.732,-26.06 16.205,-27.534 v2(16.205,-29.362)
pads on no net: J2.7 J2.13 J2.MH3 JP1.5 JP2.6 JP2.7 JP2.8 U3.1 U3.2 U3.3 U3.5 U3.6 U3.7 U3.8 U3.9 U3.10 U3.11 U3.12 U3.18 U3.19 U3.20 U3.21 U3.22 U3.57 U3.58 U3.61 U3.68 U3.69 U3.70 U3.71 U3.72 U3.77 U3.79 U3.80

## Keep-outs
Keep-Out Layer:
  lines w0.254: 39,-58.104 39,-49.036 ; 0,-59 1,-60 38,-60 39,-59 39,-1 38,0 1,0 0,-1 0,-59

## Other copper
Top Layer:
  rectangle net GND: 23.927,-56.286 26.264,-52.68
  rectangle net GND: 23.241,-56.286 24.46,-52.73
  rectangle net GND: 35.687,-54.686 37.948,-52.324
  rectangle net GND: 32.664,-50.902 33.731,-48.387
  rectangle net GND: 37.109,-42.266 38.43,-36.347
  rectangle net GND: 16.027,-25.248 16.51,-20.015
  rectangle net GND: 16.51,-25.248 21.92,-24.816
  rectangle net GND: 21.311,-27.28 21.946,-24.816
  rectangle net GND: 21.311,-27.28 23.571,-26.416
  rectangle net GND: 22.784,-31.471 23.571,-26.949
  rectangle net GND: 16.408,-20.269 18.39,-14.249
  rectangle net GND: 9.855,-55.499 11.074,-53.213
  rectangle net GND: 20.269,-52.934 26.264,-51.892
  rectangle net GND: 17.323,-52.375 22.606,-50.14
  rectangle net GND: 24.994,-55.855 26.264,-52.603
  rectangle net GND: 32.741,-52.375 37.897,-50.317
  rectangle net GND: 36.932,-42.266 37.973,-41.808
  rectangle net GND: 35.179,-42.291 37.541,-41.808
  rectangle net GND: 30.505,-48.59 34.417,-47.93
  rectangle net GND: 14.224,-20.345 18.034,-19.406
  rectangle net VCC5V: 26.035,-51.435 28.27,-50.419
  rectangle net VCC5V: 10.871,-51.384 12.878,-50.368
  rectangle net VCC18: 30.353,-57.099 31.445,-51.968
  rectangle net VCC33: 15.037,-56.667 16.104,-51.638
  rectangle net VCC18: 32.004,-58.064 36.398,-56.515
  rectangle net VCC18: 25.019,-58.039 29.718,-57.099
  rectangle net VCC33: 9.881,-57.988 14.3,-57.023
  rectangle net VCC33: 16.891,-58.471 22.53,-56.388
Bottom Layer:
  rectangle net GND: 8.357,-17.069 18.39,-14.249
  rectangle net GND: 6.807,-52.857 22.606,-50.14
  rectangle net GND: 6.807,-52.857 8.865,-26.822
  rectangle net GND: 6.807,-28.118 9.754,-26.822
  rectangle net GND: 8.23,-28.118 9.754,-11.151
  rectangle net GND: 0.584,-18.796 9.703,-16.104
  rectangle net GND: 0.584,-13.564 9.601,-11.151
  rectangle net GND: 25.933,-42.672 26.975,-41.453
  rectangle net GND: 25.349,-42.672 26.746,-41.961
  rectangle net GND: 15.697,-42.647 17.958,-41.046
  rectangle net GND: 15.646,-42.621 16.332,-36.652
  rectangle net GND: 15.646,-37.338 20.853,-36.652
  rectangle net GND: 15.697,-42.647 20.498,-41.986
  rectangle net GND: 20.32,-37.338 25.857,-36.652
  rectangle net GND: 20.193,-42.672 25.73,-41.986
  rectangle net GND: 23.114,-56.312 37.948,-54.966
  rectangle net GND: 35.738,-56.261 37.922,-52.959
  rectangle net GND: 30.277,-55.55 31.521,-53.416

## Silkscreen, mask and mechanical layers (free items; w line width, h text height)
Top Overlay:
  lines w0.254: 0,-26.848 10.058,-26.848 ; 0.051,-39.827 9.728,-39.827 ; 40.125,-1.606 40.615,-0.077 ; 40.361,-0.079 40.869,-0.074 ; 40.379,-23.559 40.904,-25.077 ; 40.65,-25.079 41.158,-25.074 ; 40.651,-3.157 40.615,-0.077 ; 40.869,-21.996 40.904,-25.077 ; 41.141,-1.595 40.615,-0.077 ; 41.395,-23.547 40.904,-25.077 ; 9.728,-39.827 14.63,-39.827 14.63,-42.189 14.275,-42.189 9.728,-42.189 9.728,-39.827 ; 10.058,-26.848 15.011,-26.848 15.011,-29.667 10.058,-29.667 10.058,-26.848
  text "25.00167 (mm)" at 39.74,-3.421 h1.52 r270.66
  text "RST" at 10.516,-29.007 h1.52
  text "DEF" at 10.262,-41.758 h1.52
Bottom Overlay:
  text "NC" at 35.484,-7.849 h1.02
  text "DEF" at 8.992,-7.899 h1.02
  text "RST" at 9.093,-10.287 h1.02
  text "NC" at 35.535,-10.363 h1.02
  text "NC" at 35.509,-12.751 h1.02
  text "GND" at 9.093,-12.802 h1.02
  text "NC" at 8.865,-15.392 h1.02
  text "RTS" at 35.509,-15.443 h1.02
  text "GND" at 9.068,-17.983 h1.02
  text "CTS" at 35.535,-18.009 h1.02
  text "+5V" at 9.195,-20.345 h1.02
  text "485_TEN" at 35.814,-20.447 h1.02
  text "RXD" at 35.578,-22.893 h1.02
  text "EX_RXD" at 9.246,-23.165 h1.02
  text "TXD" at 35.578,-25.392 h1.02
  text "EX_TXD" at 9.246,-25.654 h1.02

## Dimensions
0,-1 to 39,-1 on Top Overlay